# Altium PCB RD3399-20181026.PCBDOC (part 2 of 2)
Units mil, origin at the board's own origin, x right, y up, seen from the top; angles counter-clockwise.
Board outline 4930.59 x 3741.42 mil, 4 copper layers (TOP, GND, POWER, BOTTOM), stack 28.234 mil thick; 208 components, 334 nets, 961 pads, 292 vias.
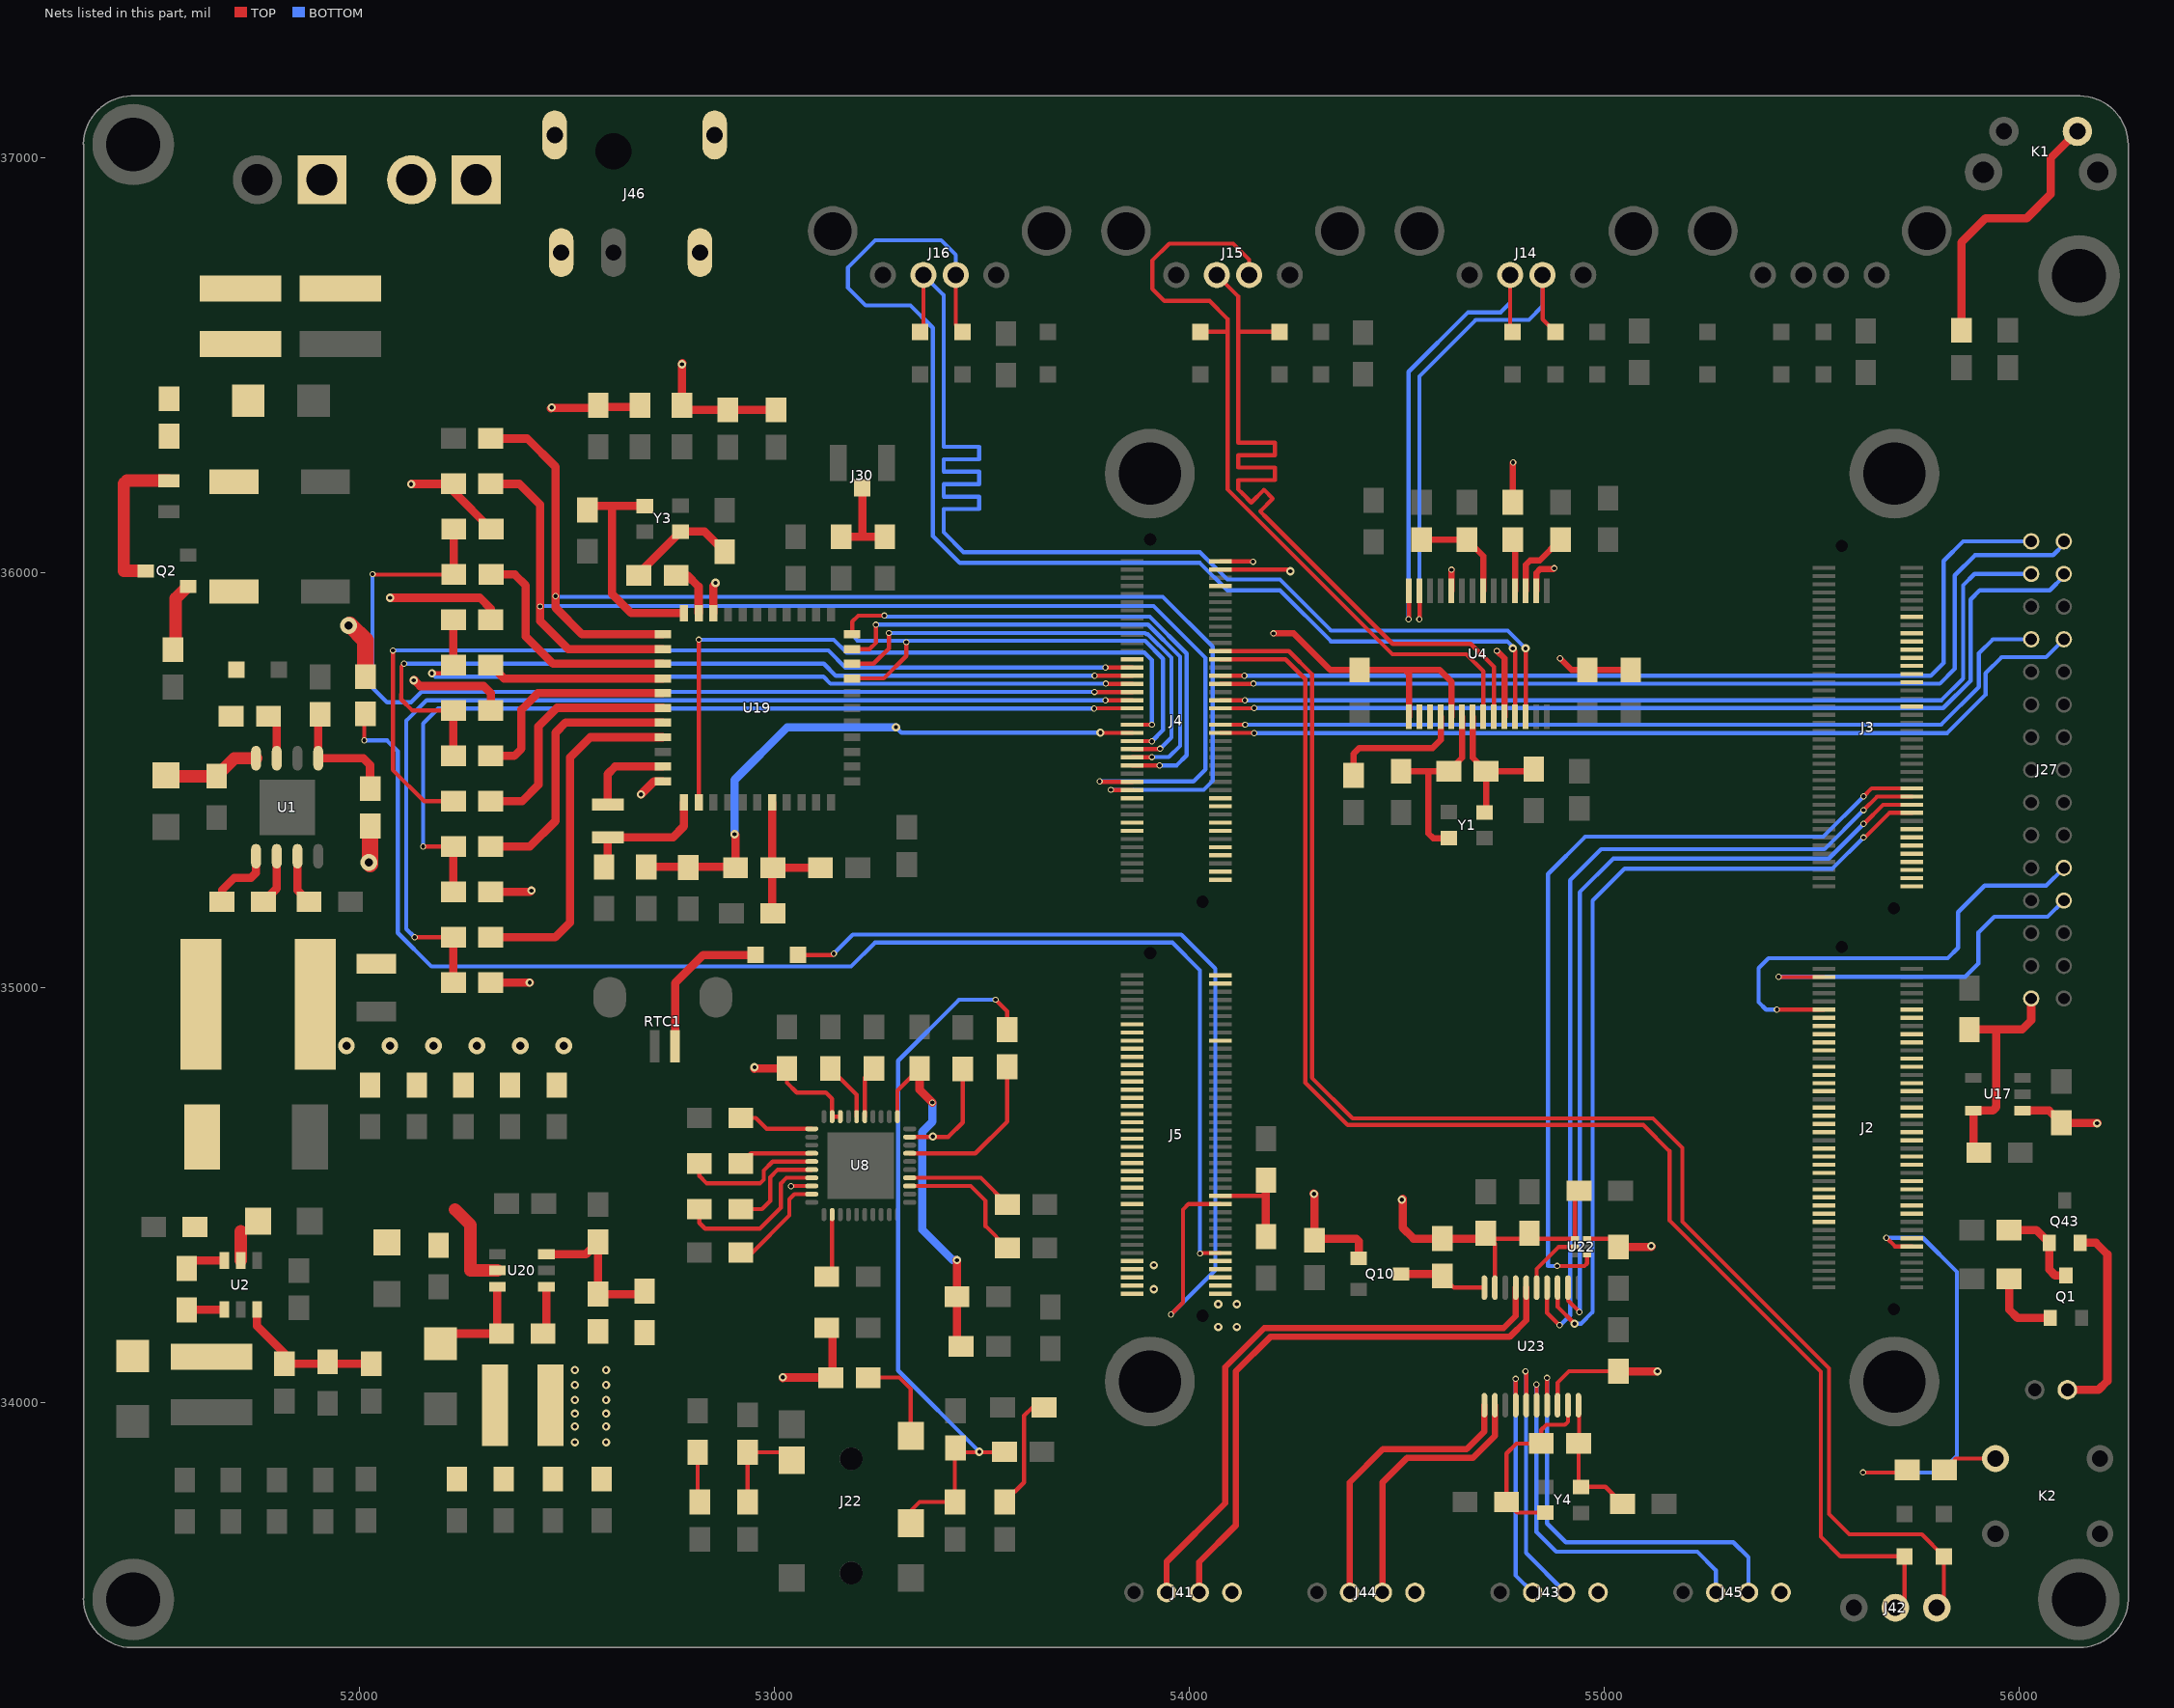
[diagram p4: the nets of this part, all layers, seen from the top]

## Via types
v1: diameter 15, hole 10, TOP to BOTTOM, 127 vias
v2: diameter 40, hole 20, TOP to BOTTOM, 86 vias
v3: diameter 20, hole 10, TOP to BOTTOM, 79 vias

## Nets (pads, with @x,y where several pads share a name; then routed paths per layer and width w, separated by ;. In a path a pad name is that pad's centre, name@x,y a point inside that pad or via, vN(x,y) a via of type N, cw(c..) or ccw(c..) an arc to the next point about the centre after c; other vN are vias at no path point) (continued)
MIPI_TX0_D1N: J4.20 J27.24 | length 2087.6
  TOP w10: J4.20@54075.47,35634.06 54134.94,35634.06 v1(54135,35634)
  BOTTOM w10: v1(54135,35634) 55813,35634 55904,35725 55904,35806 55937.99,35839.99 J27.24@56030.24,35839.99
MIPI_TX0_D1P: J4.19 J27.23 | length 2161.5
  TOP w10: J4.19@54075.47,35614.37 v1@54157.37,35614.37 ; v1(54157,35614) v1@54157.37,35614.37 ; v1@54157.37,35614.37 54158,35615 54158.63,35614.37 v1@54157.37,35614.37
  BOTTOM w10: v1(54157,35614) 55828,35614 55920,35706 55920,35758 55959,35797 56065.99,35797 J27.23@56108.98,35839.99
MIPI_TX0_D2N: J4.23 J27.28 | length 2212.6
  TOP w10: J4.23@54075.47,35693.11 v1(54134.11,35693.11)
  BOTTOM w10: v1(54134.11,35693.11) 55814,35693.11 55866,35745.11 55866,35970 55893.47,35997.47 J27.28@56030.24,35997.47
MIPI_TX0_D2P: J4.22 J27.27 | length 2285.8
  TOP w10: J4.22@54075.47,35673.43 54156.43,35673.43 v1(54157,35674)
  BOTTOM w10: v1(54157,35674) 55818,35674 55884,35740 55884,35936 55906,35958 56075,35958 56108.98,35991.98 J27.27@56108.98,35997.47
MIPI_TX0_D3N: J4.26 J27.30 | length 2233.2
  TOP w10: J4.26@54075.47,35752.17 54132.83,35752.17 v1(54133,35752)
  BOTTOM w10: v1(54133,35752) 55788,35752 55819,35783 55819,36029 55866.21,36076.21 J27.30@56030.24,36076.21
MIPI_TX0_D3P: J4.25 J27.29 | length 2311.9
  TOP w10: J4.25@54075.47,35732.48 54154.48,35732.48 v1(54155,35733)
  BOTTOM w10: v1(54155,35733) 55810,35733 55846,35769 55846,35994 55895,36043 56083,36043 56108.98,36068.98 J27.29@56108.98,36076.21
MIPI_TX1/RX1_CLKN: J4.4
MIPI_TX1/RX1_CLKP: J4.5
MIPI_TX1/RX1_D0N: J5.39
MIPI_TX1/RX1_D0P: J5.40
MIPI_TX1/RX1_D1N: J4.1
MIPI_TX1/RX1_D1P: J4.2
MIPI_TX1/RX1_D2N: J4.7
MIPI_TX1/RX1_D2P: J4.8
MIPI_TX1/RX1_D3N: J4.10
MIPI_TX1/RX1_D3P: J4.11
NetC3_1: C3.1 U1.2 | length 123.2
  TOP w20: C3.1@51768,35207 51800,35239 U1.2@51800,35316.9
NetC3_2: C3.2 D2.2 L1.1 U1.1 | length 167.3
  TOP w20: C3.2@51668,35207 51668,35235 51698,35265 51738,35265 51750,35277 U1.1@51750,35316.9
NetC7_2: C7.2 U1.3 | length 121.5
  TOP w20: U1.3@51850,35316.9 51850,35235 C7.2@51878,35207
NetC8_1: C8.1 U2.1 | length 91
  TOP w20: C8.1@51583,34223 51583.9,34223.9 U2.1@51673.6,34223.9
NetC8_2: C8.2 D12.2 L2.1 U2.6 | length 101
  TOP w20: C8.2@51583,34323 51602.1,34342.1 U2.6@51673.6,34342.1 ; L2.1@51641.23,34111.7 L2.1@51643,34109.93
NetC11_2: C11.2 R6.2 R8.1 U2.3 | length 368
  TOP w20: U2.3@51752.4,34223.9 51752.4,34184.6 51818.06,34118.94 R6.2@51818.06,34093 R8.1@52027.94,34093
NetC44_2: C44.2 U8.11 | length 181.8
  TOP w10: C44.2@52919,34686 52955,34686 52981.42,34659.58 U8.11@53089.89,34659.58
NetC45_2: C45.2 U8.5 | length 125.1
  TOP w10: U8.5@53217.84,34689.11 53217.84,34782.84 C45.2@53240,34805
NetC46_2: C46.2 U8.6 | length 142.1
  TOP w10: C46.2@53135,34805 53198.16,34741.84 U8.6@53198.16,34689.11
NetC48_1: C48.1 U8.16 | length 243.7
  TOP w10: C48.1@52919,34466 52970,34466 52990,34486 52990,34543 53008.16,34561.16 U8.16@53089.89,34561.16
NetC48_2: C48.2 U8.17 | length 394.7
  TOP w10: C48.2@52819,34466 52819,34433 52833,34419 52965,34419 53015.47,34469.47 53015.47,34528 53028.94,34541.47 U8.17@53089.89,34541.47
NetC49_1: C49.1 U8.14 | length 165.5
  TOP w10: C49.1@52930,34587 52943.53,34600.53 U8.14@53089.89,34600.53
NetC49_2: C49.2 U8.15 | length 343.1
  TOP w10: C49.2@52819,34576 52819,34546 52837,34528 52965,34528 52974,34537 52974,34559 52995.84,34580.84 U8.15@53089.89,34580.84
NetC53_1: C53.1 U8.22 | length 159
  TOP w10: C53.1@53126,34303 53139.1,34316.1 U8.22@53139.1,34452.89 ; U8.22@53139.88,34452.89 U8.22@53139.88,34456.57
NetC56_1: C56.1 U8.19 | length 252.2
  TOP w10: C56.1@52919,34361 52946,34361 53036,34451 53036,34490 53048.1,34502.1 U8.19@53089.89,34502.1
NetC65_1: C65.1 R45.1 | length 283.8
  TOP w10: R45.1@53554.94,33760 53602,33807.06 53602,33968 53622,33988 C65.1@53650,33988
NetC66_1: C66.1 R46.1 | length 122
  TOP w10: C66.1@52815,33880 52815,33764.94 R46.1@52819.94,33760
NetC143_1: C143.1 C144.2 J30.1 | length 225
  TOP w20: C144.2@53161,36087 53216,36087 ; J30.1@53212,36205.35 53212,36091 53216,36087 ; C143.1@53266,36087 53216,36087
NetC145_1: C145.1 R112.1 Y3.1 | length 273.7
  TOP w20: R112.1@52673,35993.94 52673,35998.84 Y3.1@52773.66,36099.5 52831.5,36099.5 C145.1@52880,36051
NetC157_2: C157.2 L4.1 U19.23 | length 327.5
  TOP w20: C157.2@52589,35291 52598,35300 L4.1@52598,35362.63 52755.46,35362.63 52781.83,35389 U19.23@52781.83,35446.33
NetC158_2: C158.2 R119.1 R120.2 U19.29 | length 385.2
  TOP w10: R119.1@52994.43,35290.63 R119.1@52996,35289.06
  TOP w20: U19.29@52994.43,35446.33 52994.43,35290.63 52994.43,35180.57 C158.2@52996,35179 ; R119.1@52996,35289.06 R120.2@53111,35289.06
NetC168_1: C168.1 U20.1 | length 116
  TOP w20: C168.1@52442,34166 52450.1,34174.1 U20.1@52450.1,34278.6
NetC168_2: C168.2 D14.2 L5.1 U20.6 | length 269.3
  TOP w20: D14.2@52191,34169.7 52194.7,34166 C168.2@52342,34166 52331.9,34176.1 U20.6@52331.9,34278.6
NetC171_2: C171.2 R127.2 R129.1 U20.3 | length 378.1
  TOP w20: U20.3@52450.1,34357.4 52545.47,34357.4 R129.1@52575.06,34387 R127.2@52575.06,34261 52680,34261 C171.2@52687,34268
NetD1_1: D1.1 RTC1.1 | length 374.8
  TOP w20: RTC1.1@52760.53,34858.82 52760.53,35011.53 52827.8,35078.8 D1.1@52954.8,35078.8
NetD4_1: D4.1 Q2.3 R9.2 | length 374.9
  TOP w30: Q2.3@51483.82,36005 51431,36005 51431,36215 51438.4,36222.4 D4.1@51540,36222.4
NetJ2_6: J2.6 R146.2 | length 1069.5
  TOP w10: v1(55625,33831) 55724.94,33831 R146.2@55731,33837.06 ; v1(55681,34397) 55701.82,34376.18 J2.6@55742.8,34376.18
  BOTTOM w10: v1(55625,33831) 55811,33831 55851,33871 55851,34315 55769,34397 v1(55681,34397)
NetJ7_1: J7.1 L7.1 SW.2
NetJ10_2: J10.2 Q43.2 | length 487.6
  TOP w20: J10.2@56117.5,34030.33 56192.33,34030.33 56214,34052 56214,34357 56186.18,34384.82 Q43.2@56148.4,34384.82
NetJ22_4: J22.4 R41.1 R43.1 | length 234.4
  TOP w10: R43.1@52934.94,33760 52935.06,33760.13 R41.1@52935.06,33880 53021.65,33880 J22.4@53041.3,33860.35
NetJ22_5: J22.5 R44.1 | length 223.2
  TOP w10: R44.1@53230,34060.06 53300.94,34060.06 53328.7,34032.3 J22.5@53328.7,33919.35
NetJ46_2: J46.2 J46.5 J46.6 L8.1
NetJ46_4: J46.4 SW.1
NetK1_1: K1.1 R5.2 | length 653.4
  TOP w20: R5.2@55862.06,36585 55862.06,36797.06 55920,36855 56019,36855 56077,36913 56077,37000.05 K1.1@56141.58,37064.63
NetL4_2: L4.2 U19.21 | length 213.7
  TOP w20: L4.2@52598,35441.37 52598,35515 52615.95,35532.95 U19.21@52730.65,35532.95
NetQ1_1: Q1.1 R10.1 | length 181.7
  TOP w20: R10.1@55977,34297.7 55977,34224 55997.18,34203.82 Q1.1@56076.6,34203.82
NetQ1_3: Q1.3 Q43.1 R151.2 | length 220.2
  TOP w20: R151.2@55977,34415.94 56042.48,34415.94 Q43.1@56073.6,34384.82 56073.6,34320.4 56087.82,34306.18 Q1.3@56114,34306.18
NetQ2_1: Q2.1 R11.2 | length 168.1
  TOP w30: R11.2@51550.06,35815 51556.6,35821.53 51556.6,35939 51585.2,35967.6 Q2.1@51586.18,35967.6
NetR3_1: R3.1 R4.1 U1.5 | length 296.7
  TOP w20: R4.1@51905.06,35659 51900,35653.94 U1.5@51900,35553.1 52008.9,35553.1 52025.06,35536.94 R3.1@52025.06,35480
NetR12_2: R12.2 U4.4 | length 332.4
  TOP w15: R12.2@54396.06,35512 54396.06,35564.06 54410,35578 54587,35578 54606.8,35597.8 U4.4@54606.8,35653.43
NetR13_1: R13.1 R15.1 U4.21 | length 249.6
  TOP w15: R13.1@54560.06,36080 R15.1@54670.06,36080 54709.17,36040.9 U4.21@54709.17,35956.57
NetR16_1: R16.1 U4.18 | length 125.9
  TOP w15: R16.1@54780.06,36080 54785.94,36074.13 U4.18@54785.94,35956.57
NetR17_1: R17.1 U4.17 | length 171.5
  TOP w15: U4.17@54811.53,35956.57 54811.53,36019.53 54822,36030 54845.06,36030 R17.1@54895.06,36080
NetR29_2: R29.2 U8.37 | length 398.5
  TOP w10: U8.37@53326.11,34600.53 53484.53,34600.53 53560.94,34676.94 R29.2@53560.94,34809
NetR32_2: R32.2 U8.33 | length 333.6
  TOP w10: U8.33@53326.11,34521.79 53473.21,34521.79 53509,34486 53509,34425.06 R32.2@53562,34372.06
NetR33_2: R33.2 U8.34 | length 262.6
  TOP w10: U8.34@53326.11,34541.47 53497.59,34541.47 R33.2@53562,34477.06
PCIE_CLKREQN_U: J4.70
PCIE_REF_CLKN: J2.35
PCIE_REF_CLKP: J2.34
PCIE_RX0_N: J2.14
PCIE_RX0_P: J2.13
PCIE_RX1_N: J2.20
PCIE_RX1_P: J2.19
PCIE_RX2_N: J2.26
PCIE_RX2_P: J2.25
PCIE_RX3_N: J2.32
PCIE_RX3_P: J2.31
PCIE_TX0N: J2.11
PCIE_TX0P: J2.10
PCIE_TX1N: J2.17
PCIE_TX1P: J2.16
PCIE_TX2N: J2.23
PCIE_TX2P: J2.22
PCIE_TX3N: J2.29
PCIE_TX3P: J2.28
PHE_DET: J22.3 R29.1 R36.1 R40.1 R42.1 | length 1788.7
  TOP w10: J22.3@53328.7,33708.75 53328.7,33738.7 53350,33760 R42.1@53434.94,33760 53434.94,33879.87 53435.06,33880 R36.1@53555.06,33880 ; v1(53533,34971) 53560.94,34943.06 R29.1@53560.94,34899
  BOTTOM w10: v3(53494,33881) 53298,34077 53298,34824 53445,34971 v1(53533,34971)
PHY_INT: J3.34
PHY_PMEB: J3.23
PHY_RST: J3.26
PHY_TXCLK: J3.32
PHY_TXD0: J3.31
PHY_TXD1: J3.30
PHY_TXD2: J3.29
PHY_TXD3: J3.28
PHY_TXEN: J3.27
PORT_HPD: J4.74
POWER_EN: R2.2 U1.7 | length 81.8
  TOP w20: U1.7@51800,35553.1 R2.2@51800,35634.94
PW_EN: J5.6 R1.1 | length 3347.1
  TOP w10: v1(52011,35596) R1.1@52011,35656.94 ; v1(54026,34359) 54027.43,34360.43 J5.6@54075.47,34360.43
  TOP w20: R1.1@52011,35656.94 R1.1@52014.06,35660
  BOTTOM w10: v1(52011,35596) 52066,35596 52092,35570 52092,35132 52173,35051 53185,35051 53242.64,35108.64 53959.36,35108.64 54026,35042 v1(54026,34359)
PWR_KEY: J2.7
RK3399_26M_OUT: J4.53
RST_KEY: K2.1 R146.1 | length 134.4
  TOP w10: R146.1@55821,33837.06 55848.49,33864.55 K2.1@55944.02,33864.55
RX2: D10.2 J4.29 J42.3 | length 3659.1
  TOP w10: J4.29@54075.47,35811.22 54240.62,35811.22 54296,35755.84 54296,34782.84 54393.92,34684.92 55118.08,34684.92 55189,34614 55189,34435.84 55542.68,34082.15 55542.68,33731 55591.68,33682 55766.6,33682 D10.2@55819.8,33628.8 55819.8,33522.32 J42.3@55802.64,33505.16
RXD5: J43.2 U23.15 | length 656.8
  TOP w10: v1(54811,34075) 54812.59,34073.41 U23.15@54812.59,33993.24
  BOTTOM w10: v1@54812,34077 54812,33637.02 J43.2@54907.05,33541.97
RXD6: J44.2 U23.12 | length 656.6
  TOP w15: J44.2@54465.71,33541.97 54465.71,33806.71 54525,33866 54683.64,33866 54736.99,33919.35 U23.12@54736.99,33993.24
RXD7: J45.2 U23.17 | length 1020.5
  TOP w10: U23.17@54862.99,33993.24 v1(54863,34059)
  BOTTOM w10: v1(54863,34059) 54863,33708 54908,33663 55312,33663 55348.39,33626.61 J45.2@55348.39,33541.97
RXD8: J41.2 U23.6 | length 1399.6
  TOP w15: J41.2@54024.37,33541.97 54024.37,33614.63 54024,33615 54112,33703 54112,34074.36 54195.64,34158 54772.64,34158 54812.59,34197.95 U23.6@54812.59,34276.76
SDIO_CLK: R118.2 U19.17 | length 590.6
  TOP w20: R118.2@52316,35449.35 52391.35,35449.35 52431,35489 52431,35630 52475.68,35674.68 U19.17@52730.65,35674.68
SDIO_CMD: R117.2 U19.16 | length 532.6
  TOP w20: R117.2@52316,35558.68 52372.68,35558.68 52390,35576 52390,35670.23 52429.89,35710.11 U19.16@52730.65,35710.11
SDIO_D0: R113.2 U19.18 | length 663.4
  TOP w20: R113.2@52316,35340.03 52410.03,35340.03 52472,35402 52472,35615 52496.25,35639.25 U19.18@52730.65,35639.25
SDIO_D1: R114.2 U19.19 | length 847.6
  TOP w20: R114.2@52316,35121.39 52471.39,35121.39 52507,35157 52507,35555 52555.81,35603.81 U19.19@52730.65,35603.81
SDIO_D2: R115.2 U19.14 | length 574.7
  TOP w20: R115.2@52317,35995.97 52374,35995.97 52400,35969.97 52400,35847 52466.02,35780.98 U19.14@52730.65,35780.98
SDIO_D3: R116.2 U19.15 | length 427.8
  TOP w20: R116.2@52316,35777.32 52347.78,35745.55 U19.15@52730.65,35745.55
SDMMC0_CLK: J3.5
SDMMC0_CMD: J3.6
SDMMC0_D0: J3.4
SDMMC0_D1: J3.3
SDMMC0_D2: J3.8
SDMMC0_D3: J3.7
SDMMC0_DET_L: J3.2
SDMMC0_PWR_H: J3.1
SDOUT: U22.2 U23.5 | length 159.9
  TOP w10: U23.5@54837.79,34276.76 54837.79,34321.79 54891,34375 U22.2@54930.63,34375
SPI1_CLK: J3.10 U23.3 | length 2005.6
  TOP w10: U23.3@54888.19,34276.76 54888.19,34230.81 v3(54929,34190) ; v1@55629,35362 55688.46,35421.46 J3.10@55742.8,35421.46
  BOTTOM w10: v3(54929,34190) 54945,34190 54973,34218 54973,35210 55050,35287 55551,35287 v1(55626,35362)
SPI1_CSN0: J3.11 U23.2 | length 1969.8
  TOP w10: U23.2@54913.39,34276.76 54913.39,34245.61 v1(54941,34218) ; v1@55627,35395 55673.14,35441.14 J3.11@55742.8,35441.14
  BOTTOM w10: v1@54941.67,34218 54941.67,35230 55023,35311.33 55542.33,35311.33 v1(55626,35395)
SPI1_RXD4: J3.13 U22.4 | length 2025.3
  TOP w10: v1(54887,34329) 54953,34329 54959.37,34335.37 U22.4@54959.37,34355.32 ; v1(55626,35461) 55645.51,35480.51 J3.13@55742.8,35480.51
  BOTTOM w10: v1(54887,34329) 54865,34329 54865,35274 54955,35364 55529,35364 v1(55626,35461)
SPI1_TXD4: J3.12 U23.4 | length 2093.1
  TOP w10: U23.4@54862.99,34276.76 54862.99,34216.01 v1(54893,34186) ; v1(55626,35428) 55658.83,35460.83 J3.12@55742.8,35460.83
  BOTTOM w10: v1@54895.33,34186.67 54918.33,34209.67 54918.33,35259 54993.33,35334 55532,35334 v1(55626,35428)
SPK_CTL_H: J4.37
TOUCH_RST_L: J2.42 J27.7 | length 917.4
  TOP w10: v1(55421,35026) 55421.21,35025.79 J2.42@55530.2,35025.79
  BOTTOM w10: v1(55421,35026) 55871,35026 55903,35058 55903,35133 55941,35171 56069.91,35171 J27.7@56108.98,35210.07
TX2: D11.2 J4.28 J42.2 | length 3578.9
  TOP w10: J4.28@54075.47,35791.54 54232.46,35791.54 54280,35744 54280,34771 54382.08,34668.92 55095.08,34668.92 55158,34606 55158,34439 55523,34074 55523,33676 55570.2,33628.8 D11.2@55724.8,33628.8 55724.8,33527.32 J42.2@55702.64,33505.16
TXD5: J43.3 U23.14 | length 595.6
  TOP w10: v1(54787,34056.77) 54787.39,34056.39 U23.14@54787.39,33993.24
  BOTTOM w10: v1(54787,34056.77) 54787,33583.28 J43.3@54828.31,33541.97
TXD6: J44.3 U23.11 | length 704.2
  TOP w15: J44.3@54386.97,33541.97 54386.97,33807.03 54466.94,33887 54669,33887 54711.79,33929.79 U23.11@54711.79,33993.24
TXD7: J45.3 U23.16 | length 930.1
  TOP w10: v1(54837.21,34043.21) 54837.79,34043.21 U23.16@54837.79,33993.24
  BOTTOM w10: v1(54837.21,34043.21) 54837.21,33687.79 54885,33640 55225,33640 55269.65,33595.35 J45.3@55269.65,33541.97
TXD8: J41.3 U23.7 | length 1421.5
  TOP w15: J41.3@53945.63,33541.97 53945.63,33615.83 54086.8,33757 54086.8,34084.8 54181,34179 54758,34179 54787.39,34208.39 U23.7@54787.39,34276.76
TYPEC0_CC1: J5.49
TYPEC0_CC2: J5.48
TYPEC0_DM: J5.61
TYPEC0_DP: J5.62
TYPEC0_ID: J5.60
TYPEC0_RCLKM: J5.50
TYPEC0_RCLKP: J5.51
TYPEC0_RX1N: J5.66
TYPEC0_RX1P: J5.65
TYPEC0_RX2N: J5.55
TYPEC0_RX2P: J5.54
TYPEC0_SBU1: J5.56
TYPEC0_SBU1_DC: J5.58
TYPEC0_SBU2: J5.57
TYPEC0_SBU2_DC: J5.59
TYPEC0_TX1N: J5.63
TYPEC0_TX1P: J5.64
TYPEC0_TX2N: J5.53
TYPEC0_TX2P: J5.52
TYPEC0_U2VBUSDET: J5.67
TYPEC0_U3VBUSDET: J5.47
TYPEC1_CC1: J2.49
TYPEC1_CC2: J2.48
TYPEC1_ID: J2.69
TYPEC1_RCLKM: J2.50
TYPEC1_RCLKP: J2.51
TYPEC1_RX2N: J2.56
TYPEC1_RX2P: J2.55
TYPEC1_SBU1: J2.58
TYPEC1_SBU1_DC: J2.60
TYPEC1_SBU2: J2.59
TYPEC1_SBU2_DC: J2.61
TYPEC1_TX2N: J2.54
TYPEC1_TX2P: J2.53
TYPEC1_U2VBUSDET: J2.68
TYPEC1_U3VBUSDET: J2.47
UART0_CTS: J4.63 U19.41 | length 1207.5
  TOP w10: U19.41@53187.35,35745.55 53263.55,35745.55 53318,35800 v1(53318,35833) ; J4.63@53862.87,35594.68 53909.32,35594.68 v1(53910,35594)
  BOTTOM w10: 53195.28,35842.28 53201.28,35836.28 ; 53199.72,35836.28 53201.28,35836.28 ; v1(53910,35594) 53937,35621 53937,35793 53893.72,35836.28 53201.28,35836.28
UART0_RTS: J4.66 U19.44 | length 1267.1
  TOP w10: U19.44@53187.35,35851.85 53187.35,35882.35 53202,35897 v1(53265,35897) ; J4.66@53862.87,35535.63 53928.63,35535.63 v1(53929,35536)
  BOTTOM w10: v1@53265,35894.78 53905,35894.78 53994,35805.78 53994,35560 53970,35536 v1(53929,35536)
UART0_RXD: J4.64 U19.42 | length 1145
  TOP w10: U19.42@53187.35,35780.98 53238.98,35780.98 53276,35818 v1(53276,35855) ; J4.64@53862.87,35575 53929,35575 v1(53930,35576)
  BOTTOM w10: v1@53276,35855.28 53894,35855.28 53897,35852.28 53900.34,35852.28 53957,35795.63 53957,35603 v1(53930,35576)
UART0_TXD: J4.65 U19.43 | length 1213.9
  TOP w10: U19.43@53187.35,35816.41 53229.41,35816.41 53245,35832 v1(53245,35875) ; J4.65@53862.87,35555.31 53909.31,35555.31 v1(53910,35556)
  BOTTOM w10: v1@53245,35875.28 53901,35875.28 53978,35798.28 53978,35583 53951,35556 v1(53910,35556)
UART-OSCI: C203.1 R143.2 U23.20 Y4.1 | length 308.2
  TOP w10: U23.20@54938.59,33993.24 54940,33991.82 R143.2@54940,33909.94 ; R143.2@54939,33900.94 54939,33802.16 Y4.1@54944.66,33796.5 55003.5,33796.5 C203.1@55045,33755
UART-OSCO: C204.1 R143.1 U23.19 Y4.3 | length 460.5
  TOP w10: Y4.3@54858.66,33734.5 54790.5,33734.5 C204.1@54765,33760 54765,33877 54788.94,33900.94 R143.1@54849,33900.94 54849,33934 54860.97,33945.97 54905.97,33945.97 54913.39,33953.39 U23.19@54913.39,33993.24
UART_IRQ: Q10.3 R145.2 U23.10 | length 207.3
  TOP w10: R145.2@54609.94,34305 54638.17,34276.76 U23.10@54711.79,34276.76
  TOP w20: Q10.3@54511.18,34310 R145.2@54604.94,34310
USB3_DM: J2.70
USB3_DP: J2.71
USB3_SSRXN: J2.63
USB3_SSRXP: J2.64
USB3_SSTXN: J2.65
USB3_SSTXP: J2.66
USBDN1: ED3.1 J14.2 U4.27 | length 1247.4
  TOP w10: v1(54555,35888) 54555.62,35888.62 U4.27@54555.62,35956.57 ; J14.2@54852.07,36718.5 54852.07,36611.93 ED3.1@54882.8,36581.2
  BOTTOM w10: v1(54555,35888) 54555,36474 54691,36610 54819,36610 54852.07,36643.07 J14.2@54852.07,36718.5
USBDN2: U4.2
USBDN3: ED8.1 J15.2 U4.8 | length 1967.5
  TOP w10: ED8.1@54026.8,36581.2 54092.21,36581.2 54092.41,36581 ; J15.2@54144.64,36718.5 54144.64,36755.36 54106,36794 53952,36794 53911,36753 53911,36685 53940,36656 54049,36656 54092.41,36612.59 54092.41,36581 ; U4.8@54709.17,35653.43 54709.17,35762.83 54668,35804 54490,35804 54092.41,36201.59 54092.41,36581
USBDN4: ED13.1 J16.2 U4.11 | length 2994.6
  TOP w10: ED13.1@53453.8,36581.2 53437.22,36597.78 J16.2@53437.22,36718.5 J16.2@53455,36700.72 ; v3(54780,35818) 54785.94,35812.06 U4.11@54785.94,35653.43
  BOTTOM w10: J16.2@53437.22,36718.5 53437.22,36766.78 53402,36802 53243,36802 53177,36736 53177,36688 53220,36645 53328,36645 53382,36591 53382,36089 53447,36024 54026,36024 54092,35958 54219,35958 54342,35835 54767,35835 54780,35822 v3(54780,35818)
USBDP1: ED2.1 J14.3 U4.28 | length 1195
  TOP w10: v1(54529,35888) 54530.03,35889.03 U4.28@54530.03,35956.57 ; ED2.1@54779.8,36581.2 54774.07,36586.93 J14.3@54774.07,36718.5 J14.3@54780,36712.57
  BOTTOM w10: v1(54529,35888) 54529,36484.77 54672.62,36628.38 54751,36628.38 54774.07,36651.46 J14.3@54774.07,36718.5
USBDP2: U4.3
USBDP3: ED9.1 J15.3 U4.9 | length 2003.6
  TOP w10: J15.3@54066.64,36718.5 54118,36667.14 54118,36586 ; 54118,36383 54118,36398 54118,36575 ; 54118,36389 54118,36374 54118,36344 54118,36314 54206.99,36314 54206.99,36284 54118,36284 54118,36254 54206.99,36254 54206.99,36224 54118,36224 54118,36201.59 54128.61,36190.98 54149.82,36169.77 54180.27,36200.22 54201.48,36179 54171.03,36148.56 54188.3,36131.3 54490.59,35829 54679.19,35829 54734.76,35773.43 U4.9@54734.76,35653.43 ; 54119,36574 54118,36575 ; ED9.1@54217.8,36581.2 54122.8,36581.2 54118,36586 ; 54118,36575 54118,36586
USBDP4: ED12.1 J16.3 U4.12 | length 2991.2
  TOP w10: ED12.1@53350.8,36581.2 53359.22,36589.62 J16.3@53359.22,36718.5 J16.3@53352,36711.28 ; v3(54811,35818) 54811.53,35817.47 U4.12@54811.53,35653.43
  BOTTOM w10: J16.3@53359.22,36718.5 53408,36669.72 53408,36319 53408,36304 53493.95,36304 53493.95,36274 53408,36274 53408,36244 53493.95,36244 53493.95,36214 53408,36214 53408,36184 53493.95,36184 53493.95,36154 53408,36154 53408,36098 53456,36050 54026,36050 54092,35984 54219,35984 54342,35861 54768,35861 v3(54811,35818)
V33_HUB: C17.1 C18.1 C21.1 R16.2 U4.1 U4.5 U4.10 U4.16 U4.24 | length 1265.6
  TOP w15: v1(54203,35854) 54252,35854 54340,35766 C17.1@54411,35766 54520,35766 ; U4.1@54530.03,35653.43 54530.03,35755.97 54520,35766 ; U4.5@54632.39,35653.43 54632.39,35737.61 54604,35766 54520,35766 ; U4.24@54632.39,35956.57 v1(54632.39,36007.61) ; v1(54742,35812) 54760.35,35793.65 U4.10@54760.35,35653.43 ; R16.2@54780.06,36170 54780.06,36265.06 v1(54781,36266) ; U4.16@54837.12,35956.57 54837.12,36000.12 54846,36009 54878,36009 v1(54880,36011) ; v1(54894,35794) 54922,35766 C18.1@54960,35766 C21.1@55065,35766
VBAT_WL: C5.2 C6.1 C134.1 C159.1 C160.2 C205.1 C206.1 C216.1 C231.1 J5.1 J5.2 J5.3 J5.4 J5.5 J5.76 J5.77 J5.78 J5.79 J5.80 L1.2 R1.2 R3.2 U17.1 U19.9 | length 715.4
  TOP w20: v3@52461,36397 52462,36398 52575,36398 52577,36400 C160.2@52676,36400 ; U19.9@52852.7,35903.03 52852.7,35968.7 v3@52858,35974 ; U17.1@56009.1,34703.6 56073.4,34703.6 C134.1@56103,34674 v3@56190,34674
  TOP w40: v2@51976,35875 52014.06,35836.94 R1.2@52014.06,35750 ; v2@52025.06,35297.94 R3.2@52025.06,35390
  other v2: 51968.25,34860 52073,34860 52177.75,34860 52282.5,34860 52387.25,34860 52492,34860 52022,35302 51973,35873
  other v3: 54070,34182 54115,34182 54070,34237 54115,34237 53915,34273 53915,34331 56189,34673 52858,35976 52463,36399
VCC1V8_DVP: J5.32
VCC3V0_TOUCH: J2.46 J27.9 | length 1133.2
  TOP w10: v1(55417,34947) v1(55417,34947) J2.46@55530.2,34947.05
  BOTTOM w10: v1(55417,34947) 55391,34947 55373,34965 55373,35047 55397,35071 55829,35071 55854,35096 55854,35182 55918,35246 56066.17,35246 J27.9@56108.98,35288.81
VCC3V3_SYS: C15.1 C16.1 J5.13 | length 246.9
  TOP w10: J5.13@54075.47,34498.23 54181.77,34498.23 54185,34495
  TOP w20: C16.1@54185,34400 54185,34495 C15.1@54185,34536
VCC5V0_HOST_EN: J2.72
VCC5V0_TYPEC0_EN: J5.69
VCC_1V8: C154.2 C155.2 C156.1 J4.62 R107.1 R108.1 R109.1 R110.1 R111.1 R119.2 R123.1 R124.1 R125.1 U19.22 | length 2810.9
  TOP w10: v3@53784.63,35614.37 J4.62@53862.87,35614.37
  TOP w20: v3(52073,35940) 52290,35940 52316,35914 R109.1@52316,35886.64 ; v3(52124,36214.23) 52124.39,36214.61 R123.1@52226,36214.61 52226,36196.29 R110.1@52317,36105.29 ; v3(52130,35741) 52132,35741 52146,35727 52299,35727 52316,35710 R111.1@52316,35668 ; R107.1@52316,35012.06 52409.94,35012.06 v3(52409.87,35012) ; R108.1@52316,35230.71 52410.71,35230.71 v3(52414,35234) ; v3(52678,35466) 52709.52,35497.52 U19.22@52730.65,35497.52 ; C154.2@52691,35291 52904.06,35291 R119.2@52906,35289.06 52906,35368 v3(52904,35370) ; v3@52778,36506 52777,36505 C156.1@52777,36404 52788,36393 R124.1@52887.94,36393 R125.1@53003.94,36393
  BOTTOM w10: v3(53293,35628) 53306,35615 v3(53786,35615)
  BOTTOM w20: v3(52904,35370) 52904,35501 53031,35628 v3(53293,35628)
  other v3: 52777,36503
VCC_3V0: J4.73
VCC_RTC: D1.2 J5.12 | length 2299.6
  TOP w10: D1.2@53057.2,35078.8 53139.8,35078.8 v1(53143,35082) ; v1(53956,34212) 53985,34241 53985,34465.09 53998.46,34478.54 J5.12@54075.47,34478.54
  BOTTOM w10: v1(53143,35082) 53189,35128 53981,35128 54063,35046 54063,34319 v1(53956,34212)
VCCA1V8_CODEC: C50.1 C52.1 C198.1 J4.39 Q10.1 R144.1 U8.8 U8.9 U8.18 U8.39 U22.6 | length 1221.1
  TOP w10: C50.1@53030,34805 53030,34771 53054,34747 53124,34747 53139.1,34731.9 U8.9@53139.1,34689.11 U8.8@53158.79,34689.11 ; v1(53040,34521) 53040.79,34521.79 U8.18@53089.89,34521.79 ; U8.39@53326.11,34639.9 53418.9,34639.9 53454,34675 C52.1@53454,34804 ; J4.39@54075.47,36008.07 54239.93,36008.07 v3(54244,36004) ; U22.6@54959.37,34394.69 55015.31,34394.69 C198.1@55035,34375
  TOP w20: v3@52952,34804 52953,34805 C50.1@53030,34805 ; v3@54300,34504 54301.94,34502.06 R144.1@54301.94,34395 ; R144.1@54301.94,34391 R144.1@54301.94,34395 ; Q10.1@54408.82,34347.4 54408.82,34389.18 54403,34395 R144.1@54301.94,34395 ; C198.1@55035,34375 55114,34375 v3@55115,34376
  other v3: 55114,34377 54301,34503 53382,34641 52952,34808
VCCA3V0_CODEC: C40.1 C41.1 C42.1 J4.40 R35.1 R44.2 U8.1 | length 1195.8
  TOP w10: U8.1@53296.58,34689.11 53296.58,34751.58 C40.1@53350,34805 ; J4.40@54075.47,36027.76 54153.24,36027.76 v1(54154,36027)
  TOP w20: v3@53020,34059 53021.06,34060.06 R44.2@53136,34060.06 ; C41.1@53130,34180 53140,34170 R44.2@53140,34060.06 ; C40.1@53350,34805 53350,34754 v1(53381,34723) ; v3@53439,34343 53440,34342 C42.1@53440,34255 53440,34144.94 R35.1@53450,34134.94
  BOTTOM w20: v1(53381,34723) 53381,34676.77 53356,34651.77 53356,34417 53430,34343 v3(53440,34343)
  other v3: 53020,34061
VDD_3G: C171.1 C172.1 C173.1 C174.1 C199.1 C200.1 C201.1 C202.1 C209.1 J41.1 J43.1 J44.1 J45.1 L5.2 R127.1 R145.1 U22.1 U23.9 U23.18 | length 1059.6
  TOP w10: C202.1@54715,34408 54728.31,34394.69 U22.1@54930.63,34394.69 54930.63,34500.63 C199.1@54940,34510 ; C202.1@54725,34395 54736.99,34383.01 U23.9@54736.99,34276.76 ; U23.18@54888.19,33993.24 54888.19,34047.19 54916,34075 C201.1@55035,34075
  TOP w20: v3@54515,34491 54515,34421 54541,34395 R145.1@54609.94,34395 C202.1@54725,34395 ; C201.1@55035,34075 v3@55128,34075
  other v3: 52519,33904 52594,33904 52519,33942 52594,33942 52519,33973 52594,33973 52519,34006 52594,34006 52519,34042 52594,34042 55129,34075 52519,34078 52594,34078 54513,34489
VDD_12V: C2.2 C9.1 C10.1 C169.1 C170.1 C210.1 C230.1 C232.1 D15.2 ED1.1 L7.2 R2.1 R9.1 U1.8 U2.5 U20.5 | length 515.5
  TOP w30: C210.1@51550,35510 C2.2@51655,35510 51698.1,35553.1 U1.8@51750,35553.1 ; U2.5@51713,34342.1 51713,34412.53 ; 52230,34465 52267,34428 52267,34318 U20.5@52331.9,34318
VDD_LCD: C135.1 C136.1 J27.2 U17.5 | length 563.7
  TOP w20: C136.1@55881,34899 55946,34899 ; C135.1@55904,34602 55890.9,34615.1 U17.5@55890.9,34703.6 55937.6,34703.6 55946,34712 55946,34899 ; J27.2@56030.24,34973.85 56030.24,34921.24 56008,34899 55946,34899
WIFI_CLK: J4.54 R118.1 | length 2265.3
  TOP w10: v1(52080,35813) 52080,35525 52155.65,35449.35 R118.1@52226,35449.35 ; v1(53798,35772) 53798.15,35771.85 J4.54@53862.87,35771.85
  BOTTOM w10: v1(52080,35813) 53130,35813 53171,35772 v1(53798,35772)
WIFI_CMD: J4.55 R111.2 R117.1 | length 2103.2
  TOP w10: v1(52107,35781) 52100.5,35774.5 52100.5,35708.5 52100,35708 52100,35695 52127,35668 R111.2@52226,35668 ; v1(53772.17,35752.17) J4.55@53862.87,35752.17
  TOP w20: R117.1@52226,35558.68 R111.2@52226,35668
  BOTTOM w10: v1(52107,35781) 53119,35781 53147.83,35752.17 v1(53772.17,35752.17)
WIFI_D0: J4.59 R108.2 R113.1 | length 2205.1
  TOP w10: v1(52152.97,35340.03) R113.1@52226,35340.03 ; v1(53770.85,35673) 53770.43,35673.43 J4.59@53862.87,35673.43
  TOP w20: R108.2@52226,35230.71 R113.1@52226,35340.03
  BOTTOM w10: v1(52152.97,35340.03) 52152.97,35636.97 52189,35673 v1(53770.85,35673)
WIFI_D1: J4.58 R107.2 R114.1 | length 2504.2
  TOP w10: v1(52132.61,35121.39) R114.1@52226,35121.39 R114.1@52226,35116 ; v1(53798,35693) 53798.11,35693.11 J4.58@53862.87,35693.11
  TOP w20: R107.2@52226,35012.06 R114.1@52226,35116
  BOTTOM w10: v1(52132.61,35121.39) 52112.43,35141.57 52112.43,35643.57 52161.85,35693 v1(53798,35693)
WIFI_D2: J4.57 R110.2 R115.1 | length 2436.6
  TOP w10: v1(52031,35997) 52032.03,35995.97 R115.1@52227,35995.97 ; v1(53772,35713) 53772.2,35712.8 J4.57@53862.87,35712.8
  TOP w20: R115.1@52227,35995.97 R110.2@52227,36105.29
  BOTTOM w10: v1(52031,35997) 52031,35723 52066,35688 52124,35688 52149,35713 v1(53772,35713)
WIFI_D3: J4.56 R109.2 R116.1 | length 1868.8
  TOP w10: v3(52174,35758) 52206.68,35758 R116.1@52226,35777.32 ; v1(53799,35733) 53799.52,35732.48 J4.56@53862.87,35732.48
  TOP w20: R116.1@52226,35777.32 R109.2@52226,35886.64
  BOTTOM w10: v3(52174,35758) 52182,35750 53118,35750 53135,35733 v1(53799,35733)
WIFI_HOST_WAKE: J4.68 R123.2 U19.13 | length 3015.8
  TOP w10: v1(53784,35497) 53784.74,35496.26 J4.68@53862.87,35496.26
  TOP w20: R123.2@52316,36214.61 52385,36214.61 52435,36164.61 v1(52435,35919) 52435,35884 52502.59,35816.41 U19.13@52730.65,35816.41
  BOTTOM w10: v1(52435,35919) 52436,35920 53914,35920 54039.5,35794.5 54039.5,35526.5 54010,35497 v1(53784,35497)
WIFI_REG_ON: J4.69 R121.2 U19.12 | length 3075
  TOP w10: v1(53811,35477) 53811.43,35476.57 J4.69@53862.87,35476.57
  TOP w20: R121.2@52316,36323.94 52404,36323.94 52472,36255.94 v1(52472,35944) 52472,35916 52536.15,35851.85 U19.12@52730.65,35851.85
  BOTTOM w10: v1(52472,35944) 52473.5,35942.5 53936.5,35942.5 54057,35822 54057,35499 54035,35477 v1(53811,35477)
WIFIBT_32KIN: J4.61 U19.24 | length 1708.4
  TOP w10: U19.24@52817.27,35446.33 52818,35447.07 v1(52818,35839) ; J4.61@53862.87,35634.06 53909.94,35634.06 v1(53910,35634)
  BOTTOM w10: v1(52818,35839) 53143,35839 53174,35808 53892,35808 53910,35790 v1(53910,35634)
XTAL1: C23.1 R14.2 U4.6 Y1.1 | length 463.7
  TOP w15: C23.1@54511,35522 54577,35522 ; Y1.1@54626.34,35360.5 54588.5,35360.5 54577,35372 54577,35522 ; U4.6@54657.98,35653.43 54657.98,35554.05 R14.2@54626,35522.06 54625.94,35522 54577,35522
XTAL2: C24.1 R14.1 U4.7 Y1.3 | length 362.9
  TOP w15: U4.7@54683.57,35653.43 54683.57,35554.49 R14.1@54716,35522.06 ; Y1.3@54712.34,35422.5 54716,35426.17 R14.1@54716,35522.06 ; C24.1@54831,35527 54826.06,35522.06 R14.1@54716,35522.06
XTAL_IN: R112.2 U19.10 | length 129.2
  TOP w20: R112.2@52763,35993.94 52790.06,35993.94 52817.27,35966.73 U19.10@52817.27,35903.03
XTAL_OUT: C150.2 U19.11 Y3.3 | length 547.4
  TOP w20: C150.2@52549,36152 52558.5,36161.5 52608,36161.5 ; Y3.3@52687.66,36161.5 52608,36161.5 ; U19.11@52781.83,35903.03 52654.97,35903.03 52608,35950 52608,36161.5
pads on no net: "J2. " "J3. " "J4. " "J5. " "J22. " "J46. " J12.5 J12.6 J14.5 J14.6 J15.5 J15.6 J16.5 J16.6 J22.6 J27.5 J27.6 J27.13 J27.14 J27.25 J27.26 J46.3 K1.3 K1.4 K2.3 K2.4 RTC1.3 RTC1.4 TP1.1 TP2.1 TP4.1 TP5.1 U1.6 U4.14 U4.19 U4.20 U4.22 U8.3 U8.24 U8.25 U8.26 U8.27 U8.28 U8.29 U8.38 U8.40 U17.4 U19.4 U19.5 U19.8 U19.25 U19.26 U19.27 U19.28 U19.30 U19.32 U19.35 U19.37 U19.38 U19.39 U19.40 U22.5

## Polygon pours and split planes (outlines as drawn)
GND on BOTTOM "Bottom Layer-No Net" (solid, remove dead copper, pour order 7): 51180,37333 56225,37333 56580,36978 56475,36873 56475,33304 56282,33304 56128,33150 56121,33157 51194,33157
GND on GND (split plane): 51450.01,37129.98 51450.43,37130.02
GND on GND (split plane): 51448.38,33428.86 51450.1,33429.03
GND on GND (split plane): 56154.25,37129.76 56162.78,37128.63 56171.18,37126.77 56179.39,37124.18 56187.34,37120.89 56194.97,37116.92 56202.23,37112.29 56209.05,37107.05 56215.4,37101.24 56221.21,37094.9 56226.45,37088.07 56231.07,37080.81 56235.05,37073.18 56238.34,37065.23 56240.93,37057.02 56242.79,37048.62 56243.91,37040.09 56244.26,37032.13 56244.2,37031.5 56244.2,33526.03 56243.17,33526.1 56242.58,33524.68 56244.2,33524.68 56243.95,33519 56242.83,33510.46 56240.96,33502.06 56238.37,33493.85 56235.08,33485.9 56231.11,33478.27 56226.48,33471.01 56221.24,33464.18 56215.43,33457.84 56209.08,33452.02 56202.26,33446.78 56195,33442.16 56187.36,33438.18 56179.41,33434.89 56171.2,33432.3 56162.8,33430.44 56154.27,33429.32 56146.31,33428.97 56145.67,33429.03 51450.17,33429.03 51450.2,33430.21 51449.68,33430.42 51446.15,33428.96 51444,33429.05 51435.46,33430.17 51427.06,33432.04 51418.85,33434.63 51410.9,33437.92 51403.27,33441.89 51396.01,33446.52 51389.18,33451.76 51382.84,33457.57 51377.02,33463.92 51371.78,33470.74 51367.16,33478 51363.18,33485.64 51359.89,33493.59 51357.3,33501.8 51355.44,33510.2 51354.68,33516 51355.78,33516 51354.16,33519.9 51354.16,33521.79 51354.07,33522.73 51354.14,33522.73 51354.1,33523.6 51355.65,33527.33 51354.13,33527.33 51354.16,33527.67 51354.16,37033.83 51355.21,37033.8 51355.42,37034.32 51353.96,37037.85 51354.05,37040 51355.17,37048.54 51357.04,37056.94 51359.63,37065.15 51362.92,37073.1 51366.89,37080.73 51371.52,37087.99 51376.76,37094.82 51382.57,37101.16 51388.92,37106.98 51395.74,37112.22 51403,37116.84 51410.64,37120.82 51418.59,37124.11 51426.8,37126.7 51435.2,37128.56 51443.73,37129.68 51449.52,37129.94 51449.53,37129.94 51449.56,37129.94 51449.82,37129.95 51449.82,37128.41 51453.73,37130.02 56146.15,37130.02 56146.07,37129.06 56147.64,37128.41 56147.64,37130.02 56147.65,37130.03 56147.68,37130.02 56147.82,37130.04
V33_HUB on POWER (split plane): 54900.9,36221.89 54900.9,35947.1 54646,35947.1 54644.05,35946.71 54642.4,35945.6 54608.4,35911.6 54607.29,35909.95 54606.9,35908 54606.9,35871 54607.29,35869.05 54608.4,35867.4 54637.4,35838.4 54639.05,35837.29 54641,35836.9 54910.06,35836.9 54910.4,35836.4 54912.05,35835.29 54914,35834.9 54922.89,35834.9 54941.18,35816.61 54941.29,35816.05 54941.9,35815.13 54941.9,35778.11 54939.4,35775.6 54938.99,35775.01 54938.4,35774.6 54911.89,35748.1 54292.11,35748.1 54255.6,35784.6 54253.95,35785.71 54252,35786.1 54200.11,35786.1 54170.1,35816.11 54170.1,35862.89 54194.14,35886.93 54195.95,35887.29 54197.6,35888.4 54224.11,35914.9 54308.13,35914.9 54309.05,35914.29 54311,35913.9 54312.95,35914.29 54313.87,35914.9 54545,35914.9 54546.95,35915.29 54548.6,35916.4 54562.6,35930.4 54563.71,35932.05 54564.1,35934 54564.1,36013.89 54601.11,36050.9 54696,36050.9 54697.95,36051.29 54699.6,36052.4 54732.6,36085.4 54733.71,36087.05 54734.1,36089 54734.1,36260.89 54764.11,36290.9 54831.89,36290.9
VCCA1V8_CODEC on POWER (split plane): 54308.9,36064.89 54308.9,35925.1 54222,35925.1 54220.05,35924.71 54218.4,35923.6 54193.86,35899.07 54192.05,35898.71 54190.4,35897.6 54162.89,35870.1 53704,35870.1 53702.05,35869.71 53700.4,35868.6 53569.4,35737.6 53568.29,35735.95 53567.9,35734 53567.9,34607 53568.29,34605.05 53569.4,34603.4 53590.4,34582.4 53592.05,34581.29 53594,34580.9 54191,34580.9 54192.95,34581.29 54193.87,34581.9 54328.12,34581.9 54328.29,34581.05 54329.4,34579.4 54465.4,34443.4 54467.05,34442.29 54469,34441.9 55185.89,34441.9 55196.9,34430.89 55196.9,34348.11 55192.4,34343.6 55185.89,34337.1 54373.11,34337.1 54228.6,34481.6 54226.95,34482.71 54225,34483.1 53597.87,34483.1 53596.95,34483.71 53595,34484.1 53592.87,34484.1 53591.95,34484.71 53590,34485.1 53588.05,34484.71 53587.13,34484.1 53491.11,34484.1 53476.1,34499.11 53476.1,34587 53475.71,34588.95 53474.6,34590.6 53472.95,34591.71 53471,34592.1 53321.11,34592.1 53284.6,34628.6 53282.95,34629.71 53281,34630.1 53151,34630.1 53149.05,34629.71 53147.4,34628.6 53122.4,34603.6 53121.29,34601.95 53120.9,34600 53120.9,34494.11 53103.89,34477.1 52874.1,34477.1 52874.1,34848.89 52921.11,34895.9 53256.89,34895.9 53278.9,34873.89 53278.9,34685 53278.92,34684.9 53278.29,34683.95 53277.9,34682 53278.29,34680.05 53279.4,34678.4 53281.05,34677.29 53283,34676.9 53361.13,34676.9 53362.05,34676.29 53364,34675.9 53425.89,34675.9 53443.4,34658.4 53445.05,34657.29 53447,34656.9 53448.95,34657.29 53450.6,34658.4 53451.71,34660.05 53452.1,34662 53451.71,34663.95 53450.6,34665.6 53439.31,34676.9 53453,34676.9 53454.95,34677.29 53456.6,34678.4 53473.6,34695.4 53474.71,34697.05 53475.1,34699 53475.1,34779 53474.71,34780.95 53474.1,34781.87 53474.1,35768.89 53660.11,35954.9 54150,35954.9 54151.95,35955.29 54153.6,35956.4 54192.6,35995.4 54193.71,35997.05 54194.1,35999 54194.1,36076 54193.71,36077.95 54192.6,36079.6 54164.31,36107.9 54265.89,36107.9
VCC_1V8 on POWER (split plane): 52849.05,36580.29 52851,36579.9 52871.89,36579.9 52907.9,36543.89 52907.9,36463.11 52901.89,36457.1 52288,36457.1 52286.05,36456.71 52284.4,36455.6 52197.4,36368.6 52196.29,36366.95 52195.9,36365 52195.9,35463 52196.29,35461.05 52197.4,35459.4 52345.4,35311.4 52347.05,35310.29 52349,35309.9 52455,35309.9 52456.95,35310.29 52458.6,35311.4 52696.11,35548.9 52863.89,35548.9 53015.4,35397.4 53017.05,35396.29 53019,35395.9 53162,35395.9 53163.95,35396.29 53165.6,35397.4 53197.6,35429.4 53198.71,35431.05 53199.1,35433 53198.71,35434.95 53198.08,35435.9 53198.1,35436 53198.1,35704.89 53234.11,35740.9 53330.89,35740.9 53357.9,35713.89 53357.9,35272.1 52764,35272.1 52762.05,35271.71 52761.13,35271.1 52540,35271.1 52538.05,35270.71 52536.4,35269.6 52494.4,35227.6 52493.29,35225.95 52492.9,35224 52492.9,35131.87 52492.29,35130.95 52491.9,35129 52491.9,34988.11 52463.89,34960.1 52304.11,34960.1 52282.1,34982.11 52282.1,35168 52281.71,35169.95 52281.68,35170 52281.71,35170.05 52282.1,35172 52281.71,35173.95 52280.6,35175.6 52028.1,35428.11 52028.1,36475.89 52133.11,36580.9 52848.13,36580.9
VDD_3G on POWER (split plane): 55356.9,34459.89 55356.9,34004 55356.9,33726 55357.29,33724.05 55358.4,33722.4 55498.9,33581.89 55498.9,33445.11 55483.89,33430.1 52580.11,33430.1 52421.1,33589.11 52421.1,34086.89 52471.11,34136.9 52610.89,34136.9 52654.9,34092.89 52654.9,33693 52655.29,33691.05 52656.4,33689.4 52830.4,33515.4 52832.05,33514.29 52834,33513.9 53708,33513.9 53709.95,33514.29 53711.6,33515.4 53799.11,33602.9 54904,33602.9 54905.95,33603.29 54907.6,33604.4 55037.6,33734.4 55038.71,33736.05 55039.1,33738 55039.1,34175.89 55199.6,34336.4 55205.6,34342.4 55206.71,34344.05 55207.1,34346 55207.1,34433 55206.71,34434.95 55205.6,34436.6 55191.6,34450.6 55189.95,34451.71 55188,34452.1 54471.11,34452.1 54369.95,34553.26 54370.1,34554 54369.71,34555.95 54368.6,34557.6 54344.31,34581.9 55234.89,34581.9
VCCA3V0_CODEC on POWER (split plane): 54183.9,36073.89 54183.9,36001.11 54147.89,35965.1 53658,35965.1 53656.05,35964.71 53654.4,35963.6 53465.4,35774.6 53464.29,35772.95 53463.9,35771 53463.9,34774 53464.29,34772.05 53464.9,34771.13 53464.9,34701.11 53450.89,34687.1 53289.1,34687.1 53289.1,34876 53288.71,34877.95 53287.6,34879.6 53262.6,34904.6 53260.95,34905.71 53259,34906.1 52919,34906.1 52917.05,34905.71 52915.4,34904.6 52865.4,34854.6 52864.29,34852.95 52863.9,34851 52863.9,34320 52864.29,34318.05 52865.4,34316.4 52999.4,34182.4 53001.05,34181.29 53003,34180.9 53004.58,34181.22 53059.4,34126.4 53093.4,34092.4 53095.05,34091.29 53097,34090.9 53312,34090.9 53313.95,34091.29 53315.6,34092.4 53361.6,34138.4 53362.71,34140.05 53363.1,34142 53363.1,34345.89 53384.11,34366.9 53470.89,34366.9 53503.9,34333.89 53503.9,34024.11 53466.89,33987.1 53022.11,33987.1 52917.6,34091.6 52915.95,34092.71 52914,34093.1 52913.26,34092.95 52752.1,34254.11 52752.1,34960.89 52776.11,34984.9 53295.06,34984.9 53295.4,34984.4 53297.05,34983.29 53299,34982.9 53300.95,34983.29 53302.6,34984.4 53303.39,34985.18 53303.95,34985.29 53305.6,34986.4 53306.71,34988.05 53306.82,34988.61 53366.6,35048.4 53367.71,35050.05 53368.1,35052 53368.1,35264.13 53368.71,35265.05 53369.1,35267 53368.71,35268.95 53368.1,35269.87 53368.1,35807.89 53589.11,36028.9 53962,36028.9 53963.95,36029.29 53965.6,36030.4 54040.6,36105.4 54041.71,36107.05 54042.08,36108.9 54148.89,36108.9
HUB_5V on POWER (split plane): 56178.9,36293.89 56178.9,34917.11 56117.4,34855.6 56116.29,34853.95 56115.9,34852 56115.9,34471.11 56048.89,34404.1 55909.11,34404.1 55870.1,34443.11 55870.1,35686 55869.71,35687.95 55868.6,35689.6 55714.6,35843.6 55712.95,35844.71 55711,35845.1 54927.11,35845.1 54926.6,35845.6 54924.95,35846.71 54923,35847.1 54643.11,35847.1 54617.1,35873.11 54617.1,35905.89 54648.11,35936.9 54902,35936.9 54903.95,35937.29 54905.6,35938.4 54906.71,35940.05 54906.92,35941.08 54907.95,35941.29 54909.6,35942.4 54910.71,35944.05 54911.1,35946 54911.1,36224 54910.71,36225.95 54909.6,36227.6 54837.6,36299.6 54835.95,36300.71 54834,36301.1 54762,36301.1 54760.05,36300.71 54758.4,36299.6 54725.4,36266.6 54724.29,36264.95 54723.9,36263 54723.9,36091.11 54693.89,36061.1 54599,36061.1 54597.05,36060.71 54595.4,36059.6 54555.4,36019.6 54554.29,36017.95 54553.9,36016 54553.9,35936.11 54542.89,35925.1 54319.1,35925.1 54319.1,36061.39 54320.6,36062.4 54321.71,36064.05 54322.1,36066 54322.1,36252 54321.71,36253.95 54320.6,36255.6 54150.6,36425.6 54148.95,36426.71 54147,36427.1 53241.11,36427.1 52979.6,36688.6 52977.95,36689.71 52976,36690.1 51781,36690.1 51779.05,36689.71 51777.4,36688.6 51677.4,36588.6 51676.29,36586.95 51675.9,36585 51675.9,34123 51676.29,34121.05 51677.4,34119.4 51706.4,34090.4 51708.05,34089.29 51710,34088.9 51931.89,34088.9 51982.9,34037.89 51982.9,33790.1 51564.11,33790.1 51490.1,33864.11 51490.1,36749.89 51602.11,36861.9 55610.89,36861.9
no net on POWER (split plane): 51450.01,37129.98 51450.43,37130.02
VBAT_WL on POWER (split plane): 420 vertices, not listed, extent 51353.96,33428.96 56244.26,37130.04
no net on POWER (split plane): 51448.38,33428.86 51450.1,33429.03

## Keep-outs
Keep-Out Layer:
  lines w10: 51333.41,37027.63 cw(c51456.78,37027.63) 51456.78,37151 56135.97,37151 cw(c56135.97,37022.97) 56264,37022.97 56264,33532.94 cw(c56138.62,33532.94) 56138.62,33407.56 ; 51334,37027.63 51334,33527.54 ccw(c51453.12,33527.54) 51453.12,33408.42 ; 51453.12,33409 56138.62,33409

## Other copper
TOP:
  rectangle net NetJ46_2: 51851,36632 52131,36719
  rectangle net NetJ46_2: 52421,36902 52505,37115
  rectangle net NetJ46_2: 52421,36876 52867,36964
  rectangle net NetJ7_1: 51614,36792 52179,36869
  rectangle net NetJ7_1: 51614,36654 51818,36850
  rectangle net NetJ46_4: 52219,36713 52512,36827
  rectangle net NetJ46_4: 52218,36745 52359,37052
  rectangle net NetJ7_1: 51855,36864 52178,37058
  rectangle net VBAT_WL: 54055,34162 54131,34348
  rectangle net VBAT_WL: 53836,34256 53930,34346
  rectangle net VDD_12V: 51618,35922 51772,36585
  rectangle net VDD_12V: 51489,36384 51713,36476
  rectangle net VDD_12V: 51618,35626 51723,35942
  rectangle net VDD_12V: 51433,35478 51721,35658
  rectangle net VDD_12V: 51396,34486 51490,35659
  rectangle net VDD_12V: 51401,34486 52285,34538
  rectangle net VDD_12V: 51661,34396 51731,34524
  rectangle net VDD_12V: 51573,34392 51721,34444
  rectangle net NetD4_1: 51500,36205 51579,36363
  rectangle net NetC3_2: 51568,34557 51700,35238
  rectangle net NetC8_2: 51407,34293 51608,34355
  rectangle net NetC8_2: 51408,34073 51498,34353
  rectangle net NetC8_2: 51413,34074 51743,34144
  rectangle net NetJ46_2: 52077,36593 52888,36682
  rectangle net NetJ46_2: 52747,36629 52889,37119
  rectangle net VBAT_WL: 51842,35021 52101,35117
  rectangle net VBAT_WL: 51845,34755 52509,34893
  rectangle net HUB_5V: 51548,33805 51745,33994
  rectangle net HUB_5V: 51546,33777 52052,33858
  rectangle net HUB_5V: 51795,33841 51951,34034
  rectangle net GND: 53409,33536 53590,33698
  rectangle net GND: 53292,33535 53590,33613
  rectangle net GND: 52792,33539 53074,33700
  rectangle net GND: 51548,33614 52616,33745
  rectangle net GND: 51836,34557 52514,34694
  rectangle net GND: 51858,35930 51989,36584
  rectangle net GND: 51516,36027 51605,36163
  rectangle net VDD_12V: 52049,34340 52283,34510
  rectangle net VDD_3G: 52195,33797 52613,33865
  rectangle net VDD_3G: 52425,33784 52505,34093
  rectangle net VDD_3G: 52504,33781 52613,34209
  rectangle net NetC168_2: 52287,33888 52377,34188
  rectangle net VDD_3G: 52590,34139 52716,34209
POWER (plane layer: these items are gaps in the copper):
  lines w10: 51988,33784 51988,34040 51934,34094 51710,34094 51681,34123 51681,36585 51781,36685 52976,36685 53239,36422 54147,36422 54317,36252 54317,36066 ; 51988,33785 51562,33785 51485,33862 51485,36752 51600,36867 55613,36867 56184,36296 56184,34915 56121,34852 56121,34469 56051,34399 55907,34399 55865,34441 55865,35686 55711,35840 54914,35840 ; 52277,35168 52277,34980 52302,34955 52466,34955 52497,34986 52497,35129 ; 52277,35172 52023,35426 52023,36478 52131,36586 52851,36586 ; 52498,35128 52498,35224 52540,35266 52764,35266 ; 52764,35267 53364,35267 ; 52851,36585 52874,36585 52913,36546 52913,36461 52904,36452 52288,36452 52201,36365 52201,35463 52349,35315 52455,35315 52694,35554 52866,35554 53019,35401 53162,35401 53194,35433 ; 52870,34472 53106,34472 53126,34492 53126,34600 53151,34625 53281,34625 53319,34587 53471,34587 53471,34497 53489,34479 53595,34479 ; 52914,34088 53020,33982 53469,33982 53509,34022 53509,34336 53473,34372 53384,34372 ; 52918,34081 52747,34252 52747,34963 52774,34990 53302,34990 ; 53001,34192 53067,34126 ; 53003,34186 52869,34320 52869,34851 52919,34901 53259,34901 53284,34876 53284,34685 ; 53063,34130 53097,34096 53312,34096 53358,34142 53358,34348 53382,34372 53382,34373 ; 53193,35436 53193,35707 53232,35746 53333,35746 53362,35717 ; 53283,34682 53453,34682 53470,34699 53470,34779 ; 53299,34988 53363,35052 53363,35810 53587,36034 53691,36034 53840,36034 53962,36034 54037,36109 54037,36113 ; 53364,34681 53428,34681 53447,34662 ; 53469,34774 53469,35771 53658,35960 54150,35960 54189,35999 54189,36076 54151,36114 ; 53590,34480 53592,34478 54225,34478 54371,34332 55036,34332 ; 54040,36114 54150,36114 ; 54155,36113 54268,36113 54314,36067 54314,35922 54311,35919 ; 54164,35865 53704,35865 53573,35734 53573,34607 53594,34586 54191,34586 ; 54186,34587 54332,34587 54365,34554 ; 54194,35892 54222,35920 54545,35920 54559,35934 54559,36016 54599,36056 54696,36056 54729,36089 54729,36263 54762,36296 54834,36296 54906,36224 54906,35946 ; 54194,35894 54165,35865 54165,35814 54198,35781 54252,35781 54290,35743 54914,35743 54942,35771 ; 54333,34584 54333,34583 54469,34447 55188,34447 55202,34433 55202,34346 55188,34332 55033,34332 ; 54334,34587 55237,34587 55362,34462 55362,34004 55362,33726 55504,33584 55504,33443 55486,33425 52578,33425 52416,33587 52416,34089 52469,34142 52613,34142 52660,34095 52660,33693 52834,33519 53708,33519 53797,33608 54904,33608 55034,33738 55034,34178 55196,34340 ; 54902,35942 54646,35942 54612,35908 54612,35871 54641,35842 54923,35842 54946,35819 54946,35818 54947,35817 54947,35776 54943,35772

## Silkscreen, mask and mechanical layers (free items; w line width, h text height)
OUTLINE:
  lines w1: 51334.22,37034.32 cw(c51452.33,37031.41) 51452.33,37149.55 ; 51334.45,33527.33 ccw(c51452.59,33527.33) 51449.68,33409.22 ; 51334.58,33516 51334.58,37035 ; 51447,33409.45 56145.67,33409.45 ccw(c56145.67,33527.59) 56263.78,33524.68 56263.78,37031.5 ccw(c56145.65,37031.5) 56147.64,37149.61 55789.37,37149.61 55226.38,37149.61 51449.82,37149.61

## Text inside footprints (layer, text, board x,y; h text height)
C216: PIN_NUMBER "1" at 52050,35057.66 h25 r270; PIN_NUMBER "2" at 52050,34942.34 h25 r270
C230: PIN_NUMBER "1" at 51704.83,36220 h20; PIN_NUMBER "2" at 51925.31,36220 h20
C232: PIN_NUMBER "1" at 51704.83,35955 h20; PIN_NUMBER "2" at 51925.31,35955 h20
D1: PIN_NUMBER "1" at 52944.8,35078.8 h25; PIN_NUMBER "2" at 53047.2,35078.8 h25
D2: PIN_NUMBER "2" at 51620.08,34630 h25 r180; PIN_NUMBER "1" at 51879.92,34630 h25 r180
D3: PIN_NUMBER "2" at 55964,36570.24 h25 r270; PIN_NUMBER "1" at 55964,36599.76 h25 r270
D4: PIN_NUMBER "1" at 51540,36212.4 h25 r270; PIN_NUMBER "2" at 51540,36137.6 h25 r270